# Altium PCB Rev 1.0.PcbDoc
Units mil, origin at the board's own origin, x right, y up, seen from the top; angles counter-clockwise.
Board outline 7480.31 x 3750 mil, 2 copper layers (Top Layer, Bottom Layer); 52 components, 22 nets, 145 pads, 0 vias.
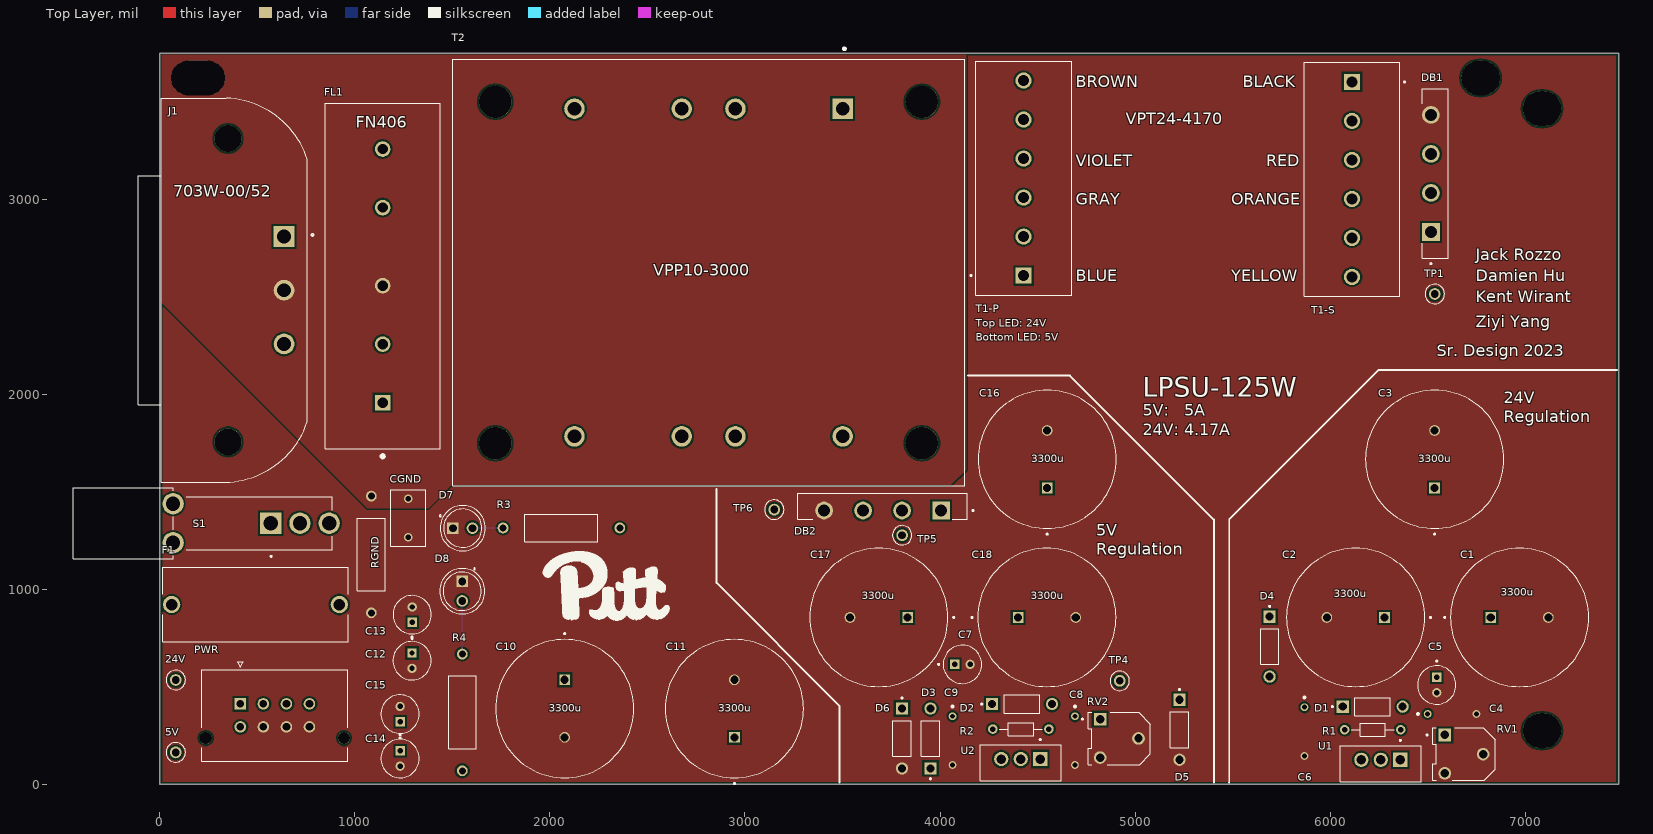
[diagram p0: Top Layer view]
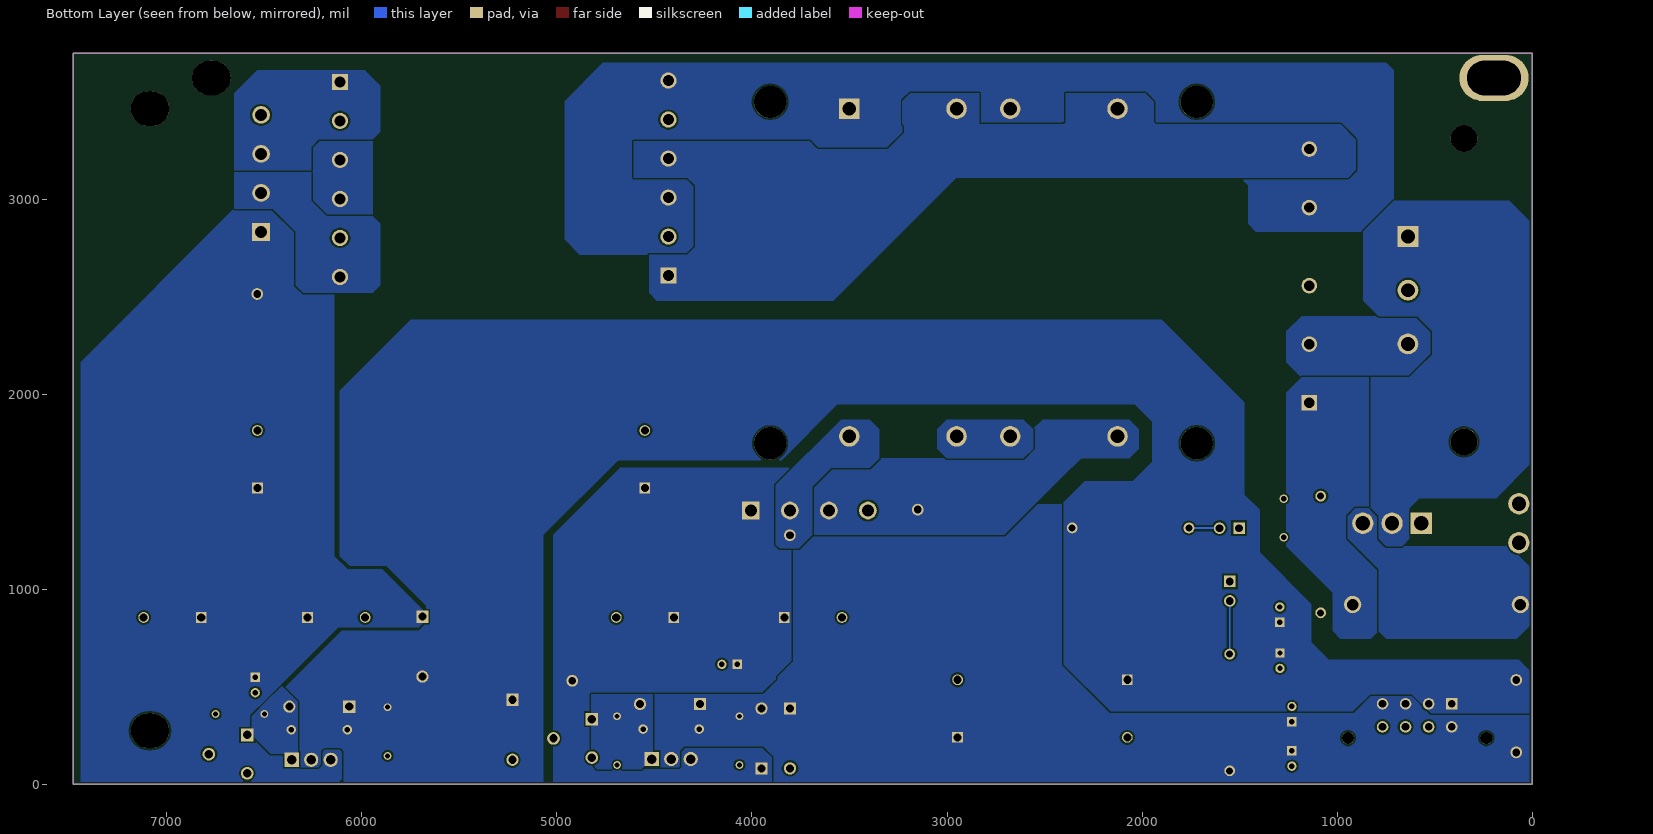
[diagram p1: Bottom Layer view, seen from below]
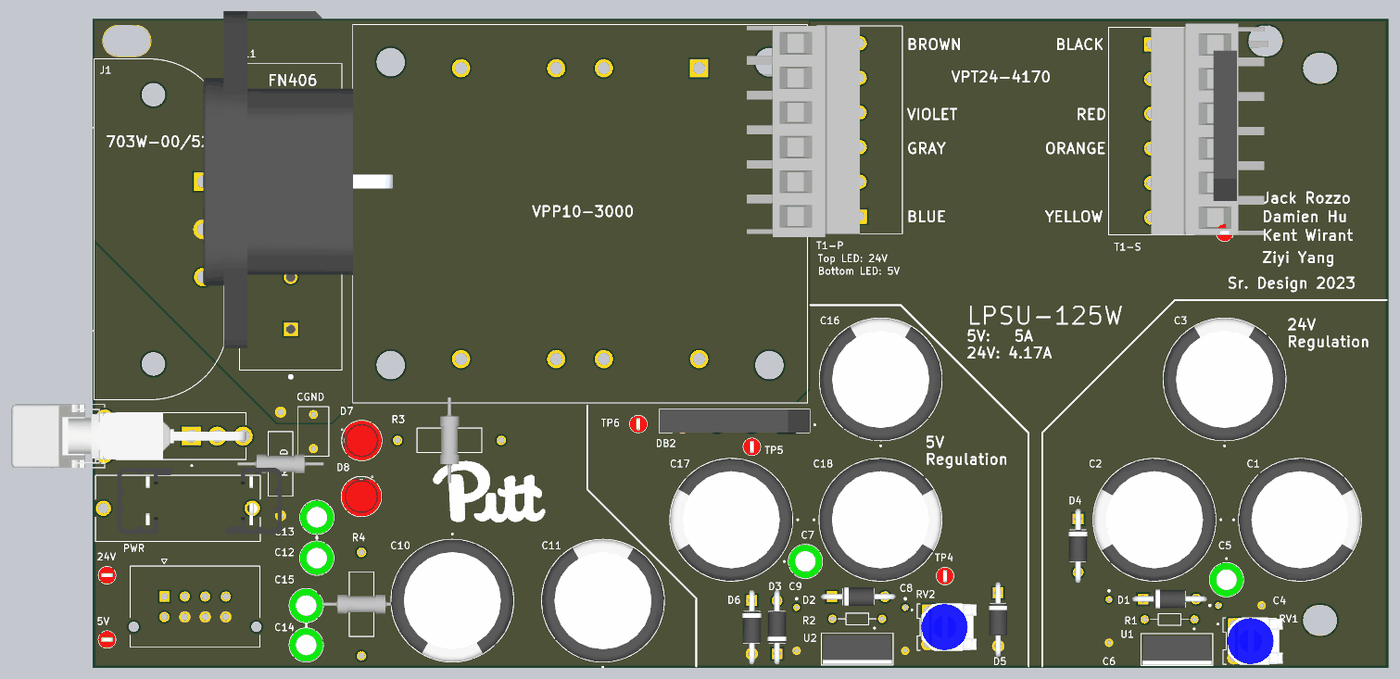
[diagram p2: 3D render of the assembled board from above, using the file's embedded part models]

## Layer stack, top to bottom
Top Solder: solder mask 0.4, Solder Resist, Dk 3.5
Top Layer: signal copper 1.4
Dielectric 1: dielectric 12.6, FR-4, Dk 4.8
Bottom Layer: signal copper 1.4
Bottom Solder: solder mask 0.4, Solder Resist, Dk 3.5

## Board outline
0,0 7480.32,0 7480.32,3750 0,3750

## Design rules (kind name [scope] priority, off if disabled: settings)
Clearance [All] p1: gap=10 ignorepadtopadclearanceinfootprint=FALSE except(0: Arc-Hole Track-Hole SMDPad-Hole THPad-Hole Via-Hole Fill-Hole Poly-Hole Region-Hole Text-Hole)
PolygonConnect [All] p1: connectstyle=Direct reliefconductorwidth=10 reliefentries=4 polygonreliefangle="90 Angle" airgapwidth=10
RoutingVias [All] p1: holewidth=28 width=50 viastyle="Through Hole" minholewidth=28 minwidth=50 maxholewidth=28 maxwidth=50
SolderMaskExpansion [All] p1: expansion=4 istentingtop=FALSE
Width [All] p1: maxlimit=10 minlimit=10 preferedwidth=10
30 further rules are at their usual default settings.

## Components (designator, comment, footprint, x,y, rotation, side; value= is the part's Value field where it differs from the comment)
5V "5000" KEYSTONE_5000 81.92,164.62 r0 top (schematic designator TP3)
24V "5000" KEYSTONE_5000 81.92,535.98 r0 top (schematic designator TP2)
C1 "UVZ1H332MHD" CAPPRD750W80D1800H3550 6971.05,856.41 r0 top
C2 "UVZ1H332MHD" CAPPRD750W80D1800H3550 6130.42,856.41 r180 top
C3 "UVZ1H332MHD" CAPPRD750W80D1800H3550 6535.43,1667.33 r90 top
C4 "10u" "6.35mm Tantalum Radial" 6499.72,361.7 r0 top
C5 "0.1u" CAPPRD200W50D550H1250 6546.51,510.06 r270 top
C6 "1u" "6.35mm Tantalum Radial" 5867.97,396.33 r270 top
C7 "0.1u" CAPPRD200W50D550H1250 4114.87,615.96 r0 top
C8 "10u" "6.35mm Tantalum Radial" 4691.64,350.02 r270 top
C9 "1u" "6.35mm Tantalum Radial" 4064.21,350.02 r270 top
C10 "4700u" CAPPRD750W80D1800H3550 2075.92,389.24 r270 top
C11 "4700u" CAPPRD750W80D1800H3550 2945.91,389.24 r90 top
C12 "0.1u" CAPPRD200W50D550H1250 1293.27,634.74 r270 top
C13 "0.1u" CAPPRD200W50D550H1250 1294.06,870.68 r90 top
C14 "0.1u" CAPPRD200W50D550H1250 1232.16,133.33 r270 top
C15 "0.1u" CAPPRD200W50D550H1250 1232.16,361.07 r90 top
C16 "UVZ1H332MHD" CAPPRD750W80D1800H3550 4549.49,1667.33 r90 top
C17 "UVZ1H332MHD" CAPPRD750W80D1800H3550 3686.33,856.41 r180 top
C18 "UVZ1H332MHD" CAPPRD750W80D1800H3550 4548.02,856.41 r0 top
CGND "0.1u Film" CAPRR500W50L730T450H950 1273.78,1366.17 r270 top
D1 "1N4007-T" DIOAD780W78L463D236 6218.02,399.05 r0 top
D2 "1N4007-T" DIOAD780W78L463D236 4420.54,412.36 r0 top
D3 "1N4007-T" DIOAD780W78L463D236 3950.94,236.12 r90 top
D4 "1N4007-T" DIOAD780W78L463D236 5689.53,706.75 r270 top
D5 "1N4007-T" DIOAD780W78L463D236 5227.95,280.68 r270 top
D6 "1N4007-T" DIOAD780W78L463D236 3804.97,236.12 r270 top
D7 "WP7113ID" LED_WP7113ID 1552.9,1314.16 r0 top
D8 "WP7113ID" LED_WP7113ID 1550.48,990.94 r270 top
DB1 "GBU801" SIP343W114P508L2205H2134Q4 6538.74,3132.93 r90 top
DB2 "GBU801" SIP343W114P508L2205H2134Q4 3705.61,1426.78 r180 top
F1 "4527" FUSE_4527 490.62,922.63 r0 top
FL1 "FN406-3-02" FIL_FN406-3-02 1142.78,2607.76 r90 top
J1 "703W-00/52" QUALTEK_703W-00/52 637.29,2809.64 r270 top
PWR "452800801" MOLEX_452800801 412.91,413.42 r180 top
R1 "270" RESAD730W45L360D200 6218.02,280.68 r180 top
R2 "270" RESAD730W45L360D200 4414.41,284.1 r180 top
R3 "1.1k" RESAD1520W70L1030D380 2059.17,1315.22 r180 top
R4 "200" RESAD1520W70L1030D380 1551.01,369.25 r90 top
RGND "200" RESAD1520W70L1030D380 1084.47,1179.14 r270 top
RV1 "5k" TRIM_3306F-1-502 6686.01,155.7 r180 top
RV2 "1k" TRIM_3306F-1-502 4919.16,236.34 r180 top
S1 "300SP1J1BLKM7QE" SW_300SP1J1BLKM7QE 718.37,1339.4 r0 top
T1-P "282847-6" TE_282847-6 4428.1,3108.92 r90 top
T1-S "282847-6" TE_282847-6 6111.97,3101.81 r270 top
T2 "VPP10-3000" XFMR_VPP10-3000 2813.48,2624.57 r270 top
TP1 "5000" KEYSTONE_5000 6536.4,2514.67 r0 top
TP4 "5000" KEYSTONE_5000 4921.26,531.5 r90 top
TP5 "5000" KEYSTONE_5000 3805.68,1277.79 r90 top
TP6 "5000" KEYSTONE_5000 3150.13,1409.26 r90 top
U1 "LM338T" TO254P1054X470X1955-3 6259.83,126.38 r180 top
U2 "LM338T" TO254P1054X470X1955-3 4413.83,130.55 r180 top

## Footprints (in the part's own frame and the unit in brackets; to place one, negate y for a bottom-side part, rotate by r counter-clockwise, add the part's x,y. Pads: shape width x height; smd on the part's side, far side on the other; paste and mask are expansions set on the pad)
"6.35mm Tantalum Radial" [mil]
  round 40 hole 25: N(250,0) P(0,0)
  silkscreen extent -55,-5 -45,5
CAPPRD200W50D550H1250 [mm]
  rect 1.208x1.208 hole 0.7: 1(-1,0)
  round 1.208 hole 0.7: 2(1,0)
  silkscreen extent -3.2,-2.5 2.5,2.5, body extent -2.5,-2.49 2.5,2.49, height 12
CAPPRD750W80D1800H3550 [mm]
  round 1.4 hole 1.05: N(3.75,0)
  rect 1.4x1.4 hole 1.05: P(-3.75,0)
  silkscreen extent -9.85,-9 9,9, body extent -8.97,-9 9,9, height 35.5
CAPRR500W50L730T450H950 [mm]
  round 1.1 hole 0.75: 1(-2.5,0) 2(2.5,0)
  silkscreen extent -3.65,-2.25 3.65,2.25
DIOAD780W78L463D236 [mm]
  round 1.59 hole 1.06: A(3.905,0)
  rect 1.59x1.59 hole 1.06: K(-3.905,0)
  silkscreen extent -5.35,-1.18 2.32,1.18, body extent -5.47,-1.35 5.47,1.35, height 2.68
FIL_FN406-3-02 [mm]
  rect 2.03x2.03 hole 1.35: 1(-16.51,0)
  round 2.03 hole 1.35: 2(-8.89,0) 3(-1.27,0) 4(8.89,0) 5(16.51,0)
  silkscreen extent -23.7,-7.5 22.5,7.5
FUSE_4527 [mm]
  round 2.25 hole 1.5: 1(-10.92,0) 2(10.92,0)
  silkscreen extent -12.08,-4.85 12.08,4.85, body extent -8.9,-3.75 15.26,5.95, height 4.55
KEYSTONE_5000 [mm]
  round 1.53 hole 1.02: TP(0,0)
  silkscreen extent -1.27,-1.27 1.27,1.27, body extent -1.26,-1.27 1.26,1.27, height 4.57
LED_WP7113ID [mm]
  round 1.508 hole 1: A(1.27,0)
  rect 1.508x1.508 hole 1: C(-1.27,0)
  silkscreen extent -3.03,-2.95 2.95,2.95, body extent -2.5,-2.95 2.93,2.95, height 9.6
MOLEX_452800801 [mm]
  rect 1.505x1.505 hole 1.005 mask+0.076: 1(0,0)
  round 1.505 hole 1.005 mask+0.076: 2(-3,0) 3(-6,0) 4(-9,0) 5(0,3) 6(-3,3) 7(-6,3) 8(-9,3)
  round 1.57 hole 1.57 unplated mask+0.076: ""(-13.5,4.45) ""(4.5,4.45)
  silkscreen extent -14,-5.49 5,7.45
QUALTEK_703W-00/52 [mm]
  rect 2.7x2.7 hole 1.8: 1(0,0)
  round 2.7 hole 1.8: 2(7,0) 3(14,0)
  round 3.5 hole 3.5 unplated: ""(-12.75,-7.3) ""(26.75,-7.3)
  silkscreen extent -18,-19 32,3.85, body extent -25.05,0 25.05,27.79, height 11.5
RESAD730W45L360D200 [mm]
  round 1.238 hole 0.73: 1(-3.65,0) 2(3.65,0)
  silkscreen extent -2.8,-0.85 2.8,0.85
RESAD1520W70L1030D380 [mm]
  round 1.408 hole 0.9: 1(-7.6,0) 2(7.6,0)
  silkscreen extent -4.75,-1.8 4.75,1.8, body extent -1.39,-6.3 1.39,6.3, height 1.4
SIP343W114P508L2205H2134Q4 [mm]
  round 2.31 hole 1.54: AC1(-2.54,0.56) AC2(2.54,0.56) NEG(7.62,0.56)
  rect 2.31x2.31 hole 1.54: POS(-7.62,0.56)
  silkscreen extent -11.86,-1.72 11.02,1.72, body extent -11.02,-1.72 11.02,1.72, height 21.55
SW_300SP1J1BLKM7QE [mm]
  rect 2.775x2.775 hole 1.85: 1(-3.81,0)
  round 2.775 hole 1.85: 2(0,0) 3(3.81,0) S1(-16.51,-2.54) S2(-16.51,2.54)
  silkscreen extent -29.54,-4.63 4.19,4.63, body extent -30.14,-4.72 4.19,4.72, height 17.1
TE_282847-6 [mm]
  rect 2.1x2.1 hole 1.4: 1(-12.7,0)
  round 2.1 hole 1.4: 2(-7.62,0) 3(-2.54,0) 4(2.54,0) 5(7.62,0) 6(12.7,0)
  silkscreen extent -15.24,-6.25 15.24,6.95, body extent -15.74,0 15.24,17.14, height 4.18
TO254P1054X470X1955-3 [mm]
  rect 1.86x1.86 hole 1.24: 1(-2.54,0)
  round 1.86 hole 1.24: 2(0,0) 3(2.54,0)
  silkscreen extent -5.27,-2.64 5.27,2.86, body extent -5.08,-1.49 5.08,2.71, height 22.86
TRIM_3306F-1-502 [mm]
  rect 1.65x1.65 hole 1.1: 1(2.5,-2.5)
  round 1.65 hole 1.1: 2(-2.5,0) 3(2.5,2.5)
  silkscreen extent -4.05,-3.4 4.9,3.4, body extent -4.7,-3.4 3.4,3.4, height 8.38
XFMR_VPP10-3000 [mil]
  rect 105x105 hole 70: 1(-840,687.5)
  round 105 hole 70: 3(-840,137.5) 4(-840,-137.5) 6(-840,-687.5) 7(840,687.5) 9(840,137.5) 10(840,-137.5) 12(840,-687.5)
  round 166 hole 166 unplated: ""(-875,1093.5) ""(-875,-1093.5) ""(875,1093.5) ""(875,-1093.5)
  silkscreen extent -1153,-1313 1094,1312

## Part data
5V 24V D1 D2 D3 D4 D5 D6 DB1 DB2 F1 PWR S1 T1-P T1-S TP1 TP4 TP5 TP6: Package=None, Availability=Unavailable, Price=None
  5V 24V TP1 TP4 TP5 TP6: MF="{'manufacturer': u'Keystone Electronics'}", MP=5000
  D1 D2 D3 D4 D5 D6: MF="{'manufacturer': u'Diodes Incorporated'}", MP=1N4007-T
  DB1 DB2: MF="{'manufacturer': u'Diodes Inc.'}", MP=GBU801
  F1: MF="{'manufacturer': u'Keystone'}", MP=4527
  PWR: MF="{'manufacturer': u'Molex'}", MP=452800801
  S1: MF="{'manufacturer': u'E-Switch'}", MP=300SP1J1BLKM7QE
  T1-P T1-S: MF="{'manufacturer': u'TE Connectivity'}", MP=282847-6
C1 C2 C3 C4 C6 C8 C9 C10 C11 C16 C17 C18: library part ECA1VHG472, "NHG-A", Package=None, Availability=Unavailable, MF="{'manufacturer': u'Panasonic'}", MP=ECA1VHG472, Price=None
C5 C7 C12 C13 C14 C15: library part UVR1H0R1MDD, "0.47ÂµF 100V Aluminum Electrolytic Capacitors Radial, Can 2000 Hrs @ 85Â°C", Package=None, Availability=Unavailable, MF="{'manufacturer': u'Nichicon'}", MP=UVR1H0R1MDD, Price=None
CGND: library part B32529C3104K289, Package=None, Availability=Unavailable, MF="{'manufacturer': u'EPCOS'}", MP=B32529C3104K289, Price=None
D7 D8: "LED; Thru-Hole; Green; T1-3/4; 5mm; Clear Lens; 25ma; 565nm; 200mcd; Round", Package=None, Availability=Unavailable, MF="{'manufacturer': u'Kingbright'}", MP=WP7113ID, Price=None
FL1: "Single Phase EMC/EMI Line Filter 3A 250VAC DC ~ 400Hz Single Stage PC Pins", Package=None, Availability=Unavailable, MF="{'manufacturer': u'Schaffner EMC'}", MP=FN406-3-02, Price=None
J1: "3 Position 250 V 10 A Male Pins AC Receptacle Right Angle Connector", Package=None, Availability=Unavailable, MF="{'manufacturer': u'Qualtek'}", MP=703W-00/52, Price=None
R1 R2: library part CF18JT680R, "Res Carbon Film 680 Ohm 5% 0.125W(1/8W) -400ppm/C to 0ppm/C Conformal Coated AXL T/R", Package=None, Availability=Unavailable, MF="{'manufacturer': u'Stackpole Electronics'}", MP=CF18JT680R, Price=None
R3 R4 RGND: library part CBT50J5R1, "5.1 Ohms +/-5% 0.5W, 1/2W Through Hole Resistor Axial Pulse Withstanding Carbon Composition", Package=None, Availability=Unavailable, MF="{'manufacturer': u'TE Connectivity / AMP'}", MP=CBT50J5R1, Price=None
RV1 RV2: library part 3306F-1-502, "2 kOhms 0.2W, 1/5W PC Pins Through Hole Trimmer Potentiometer Cermet 1 Turn Top Adjustment", Package=None, Availability=Unavailable, MF="{'manufacturer': u'Bourns'}", MP=3306F-1-502, Price=None
T2: "Power Transformer 4000Vrms Dual Prim. Dual Sec. 230V/115V Prim. 10V/5V Sec. Through Hole", Package=None, Availability=Unavailable, MF="{'manufacturer': u'Triad Magnetics'}", MP=VPP10-3000, Price=None
U1 U2: library part LM338T/NOPB-ND

## Free pads (board coordinates)
  oval 275.59x177.17 / inner round 60 / far side oval 354.33x236.22 hole 177.17 slot 275.59 at 0 deg: 6(196.05,3622.05)
  oval 196.85x177.17 hole 177.17 slot 196.85 at 0 deg: CASE(7086.61,275.59) CASE(7086.61,3464.57) ENC(6771.65,3622.05)

## Nets (pads, with @x,y where several pads share a name; then routed paths per layer and width w, separated by ;. In a path a pad name is that pad's centre, name@x,y a point inside that pad or via, vN(x,y) a via of type N, cw(c..) or ccw(c..) an arc to the next point about the centre after c; other vN are vias at no path point)
+5: 5V.TP C9.P C11.P C14.1 C15.1 D2.K D3.A D6.K PWR.3 PWR.4 PWR.5 R2.2 R4.1 U2.2
+12: C7.1 C16.P C17.P C18.P D3.K DB2.POS TP4.TP U2.3
+24: 24V.TP C6.P C10.P C12.1 C13.1 D1.K D4.A D5.K PWR.1 PWR.2 R1.2 R3.1 U1.2
+32: C1.P C2.P C3.P C5.1 D4.K DB1.POS TP1.TP U1.3
_N: FL1.4 T1-P.3 T1-P.6 T2.1 T2.4
_P: FL1.5 T1-P.1 T1-P.4 T2.3 T2.6
EARTH: CGND.1 FL1.3 J1.2 pad.6 RGND.1
GND: C1.N C2.N C3.N C4.N C5.2 C6.N C7.2 C8.N C9.N C10.N C11.N C12.2 C13.2 C14.2 C15.2 C16.N C17.N C18.N CGND.2 D5.A D6.A D7.C D8.C DB1.NEG DB2.NEG PWR.6 PWR.7 PWR.8 RGND.2 RV1.2 RV1.3 RV2.2 RV2.3
NetC4_P: C4.P D1.A R1.1 RV1.1 U1.1
NetC8_P: C8.P D2.A R2.1 RV2.1 U2.1
NetD7_A: D7.A R3.2 | length 157.5
  Bottom Layer w10: D7.A 1603.44,1314.69 1759.42,1314.69 R3.2
NetD8_A: D8.A R4.2 | length 272.7
  Bottom Layer w10: D8.A 1550.75,940.68 1550.75,668.73 R4.2
NetF1_1: F1.1 S1.3
NetF1_2: F1.2 FL1.1
NetFL1_2: FL1.2 J1.3
NetJ1_1: J1.1 S1.2
NetT1-S_3: T1-S.3 T1-S.4
NetT2_9: T2.9 T2.10
T1_O1: DB1.AC2 T1-S.1
T1_O2: DB1.AC1 T1-S.6
T2_O1: DB2.AC2 T2.12 TP6.TP
T2_O2: DB2.AC1 T2.7 TP5.TP
pads on no net: J1. PWR. S1.1 S1.S1 S1.S2 T1-P.2 T1-P.5 T1-S.2 T1-S.5 T2.

## Polygon pours and split planes (outlines as drawn)
GND on Top Layer "GND_L01_P028" (solid, pour order 28): 0,0 7480.32,0 7480.32,3750 0,3750
EARTH on Top Layer "NONET_L-01_P-001" (solid, pour order 2): 9.84,2470.47 1062.99,1417.32 1377.95,1417.32 1496.06,1535.43 4055.12,1535.43 4133.86,1614.17 4133.86,3740.16 9.84,3740.16
NetC4_P on Bottom Layer "NONET_L-01_P-001" (solid, pour order 24): 6417.32,511.81 6328.74,423.23 6328.74,157.48 6466.54,157.48 6564.96,255.91 6564.96,364.17
+24 on Bottom Layer "NONET_L-01_P-001" (solid, pour order 27): 4685.04,1663.39 3848.42,1663.39 3562.99,1948.82 2037.4,1948.82 1948.82,1860.24 1948.82,1653.54 2047.24,1555.12 2293.31,1555.12 2411.42,1437.01 2411.42,610.24 2165.35,364.17 915.35,364.17 826.77,452.76 620.08,452.76 521.65,354.33 9.84,354.33 9.84,580.71 68.9,639.76 1043.31,639.76 1131.89,728.35 1131.89,925.2 1397.64,1190.94 1397.64,1407.48 1476.38,1486.22 1476.38,1958.66 1899.61,2381.89 5748.03,2381.89 6112.2,2017.72 6112.2,1171.26 6062.99,1122.05 5875.98,1122.05 5669.29,915.35 5669.29,826.77 5708.66,787.4 6102.36,787.4 6397.64,492.13 6328.74,423.23 6328.74,78.74 6220.47,78.74 6200.79,98.43 6200.79,167.32 6190.94,177.17 6112.2,177.17 6102.36,167.32 6102.36,29.53 6082.68,9.84 5068.9,9.84 5068.9,1279.53
+5 on Bottom Layer "NONET_L-01_P-001" (solid, pour order 26): 2549.21,1437.01 2411.42,1437.01 2411.42,1279.53 2411.42,610.24 2165.35,364.17 915.35,364.17 826.77,452.76 620.08,452.76 521.65,354.33 9.84,354.33 9.84,9.84 3897.64,9.84 3897.64,137.8 3946.85,187.01 4340.55,187.01 4360.24,167.32 4360.24,88.58 4370.08,78.74 4552.51,78.74 4552.51,93.16 4507.87,137.8 4507.87,472.44 3946.85,472.44 3789.37,629.92 3789.37,1210.63 3759.84,1210.63 3690.94,1279.53 2706.69,1279.53
NetC8_P on Bottom Layer "NONET_L-01_P-001" (solid, pour order 25): 4507.87,472.44 4507.87,137.8 4566.93,78.74 4793.31,78.74 4822.83,108.27 4822.83,472.44
+12 on Bottom Layer "NONET_L-01_P-001" (solid, pour order 23): 4822.83,472.44 4822.83,108.27 4793.31,78.74 4370.08,78.74 4360.24,88.58 4360.24,167.32 4340.55,187.01 3946.85,187.01 3897.64,137.8 3897.64,9.84 5019.69,9.84 5019.69,1279.53 4675.2,1624.02 3789.37,1624.02 3789.37,629.92 3937.01,482.28 3946.85,472.44
T2_O1 on Bottom Layer "NONET_L-01_P-001" (solid, pour order 22): 2066.93,1870.08 2017.72,1820.87 2017.72,1722.44 2066.93,1673.23 2312.99,1673.23 2411.42,1574.8 2706.69,1279.53 3690.94,1279.53 3690.94,1525.59 3592.52,1624.02 3395.67,1624.02 3346.46,1673.23 2608.27,1673.23 2559.06,1722.44 2559.06,1820.87 2509.84,1870.08
T2_O2 on Bottom Layer "NONET_L-01_P-001" (solid, pour order 21): 3395.67,1870.08 3346.46,1820.87 3346.46,1673.23 3395.67,1624.02 3592.52,1624.02 3690.94,1525.59 3690.94,1279.53 3759.84,1210.63 3858.27,1210.63 3877.95,1230.32 3877.95,1535.43 3543.31,1870.08 3533.46,1870.08
NetT2_9 on Bottom Layer "NONET_L-01_P-001" (solid, pour order 20): 2608.27,1870.08 2559.06,1820.87 2559.06,1722.44 2608.27,1673.23 3001.97,1673.23 3051.18,1722.44 3051.18,1820.87 3001.97,1870.08
+32 on Bottom Layer "NONET_L-01_P-001" (solid, pour order 16): 6318.9,78.74 6313.22,84.42 6313.22,141.96 6328.74,157.48 6466.54,157.48 6564.96,255.91 6564.96,364.17 6496.06,433.07 6122.05,807.09 5708.66,807.09 5688.98,826.77 5688.98,895.67 5895.67,1102.36 6072.83,1102.36 6141.73,1171.26 6141.73,2519.69 6299.21,2519.69 6338.58,2559.06 6338.58,2834.65 6456.69,2952.76 6653.54,2952.76 7440.94,2165.35 7440.94,9.84 6122.05,9.84 6102.36,29.53 6102.36,167.32 6112.2,177.17 6190.94,177.17 6200.79,167.32 6200.79,98.43 6220.47,78.74
NetT1-S_3 on Bottom Layer "NONET_L-01_P-001" (solid, pour order 14): 5944.88,3307.09 5944.88,2913.39 6181.1,2913.39 6259.84,2992.13 6259.84,3267.72 6220.47,3307.09
T1_O2 on Bottom Layer "NONET_L-01_P-001" (solid, pour order 13): 6653.54,3149.61 6653.54,2952.76 6456.69,2952.76 6338.58,2834.65 6338.58,2559.06 6299.21,2519.69 5944.88,2519.69 5905.51,2559.06 5905.51,2874.02 5944.88,2913.39 6181.1,2913.39 6259.84,2992.13 6259.84,3149.61
T1_O1 on Bottom Layer "NONET_L-01_P-001" (solid, pour order 12): 5984.25,3661.42 5905.51,3582.68 5905.51,3346.46 5944.88,3307.09 6220.47,3307.09 6259.84,3267.72 6259.84,3149.61 6653.54,3149.61 6653.54,3543.31 6535.43,3661.42
_N on Bottom Layer "NONET_L-01_P-001" (solid, pour order 11): 4763.78,3700.79 4960.63,3503.94 4960.63,2795.28 4881.89,2716.54 4291.34,2716.54 4291.34,3070.87 4330.71,3110.24 4606.3,3110.24 4606.3,3307.09 3700.79,3307.09 3661.42,3267.72 3307.09,3267.72 3228.35,3346.46 3228.35,3503.94 3188.98,3543.31 2834.65,3543.31 2834.65,3385.83 2401.57,3385.83 2401.57,3543.31 1968.5,3543.31 1929.13,3503.94 1929.13,3385.83 984.25,3385.83 905.51,3307.09 905.51,3149.61 944.88,3110.24 1496.06,3110.24 1456.69,3070.87 1456.69,2874.02 1417.32,2834.65 866.14,2834.65 708.66,2992.13 708.66,3661.42 748.03,3700.79
_P on Bottom Layer "NONET_L-01_P-001" (solid, pour order 10): 3221.14,3378.62 3221.14,3353.67 3307.09,3267.72 3661.42,3267.72 3700.79,3307.09 4606.3,3307.09 4606.3,3110.24 4330.71,3110.24 4291.34,3070.87 4291.34,2755.91 4330.71,2716.54 4527.56,2716.54 4527.56,2519.69 4488.19,2480.32 3582.68,2480.32 2952.76,3110.24 944.88,3110.24 905.51,3149.61 905.51,3307.09 984.25,3385.83 1929.13,3385.83 1929.13,3503.94 1968.5,3543.31 2401.57,3543.31 2401.57,3385.83 2834.65,3385.83 2834.65,3543.31 3188.98,3543.31 3228.35,3503.94 3228.35,3385.83
NetF1_2 on Bottom Layer "NONET_L-01_P-001" (solid, pour order 9): 826.77,2086.61 1181.1,2086.61 1259.84,2007.87 1259.84,1220.47 1023.62,984.25 1023.62,787.4 984.25,748.03 826.77,748.03 787.4,787.4 787.4,1102.36 944.88,1259.84 944.88,1377.95 905.51,1417.32 826.77,1417.32
NetF1_1 on Bottom Layer "NONET_L-01_P-001" (solid, pour order 8): 826.77,1417.32 787.4,1377.95 787.4,1259.84 748.03,1220.47 118.11,1220.47 9.59,1111.95 9.59,817.19 78.74,748.03 748.03,748.03 787.4,787.4 787.4,1102.36 944.88,1259.84 944.88,1377.95 905.51,1417.32
NetJ1_1 on Bottom Layer "NONET_L-01_P-001" (solid, pour order 7): 708.66,2992.13 866.14,2834.65 866.14,2480.31 787.4,2401.57 590.55,2401.57 511.81,2322.83 511.81,2204.72 629.92,2086.61 826.77,2086.61 826.77,1417.32 787.4,1377.95 787.4,1259.84 748.03,1220.47 669.29,1220.47 629.92,1259.84 629.92,1417.32 579.19,1468.05 185.49,1468.05 9.84,1643.7 9.84,2883.86 118.11,2992.13
NetFL1_2 on Bottom Layer "NONET_L-01_P-001" (solid, pour order 5): 590.55,2401.57 1181.1,2401.57 1259.84,2322.83 1259.84,2165.35 1181.1,2086.61 629.92,2086.61 511.81,2204.72 511.81,2322.83

## Keep-outs
Keep-Out Layer:
  lines w5: 0,0 7478.37,0 7480.32,1.95 7480.32,3750 0,3750 0,0

## Silkscreen, mask and mechanical layers (free items; w line width, h text height)
Top Overlay:
  drawing of 12 lines, arcs and shapes, not listed
  text "BROWN" at 4695.04,3573.3 h60
  text "BLACK" at 5552.26,3573.3 h60
  text "VPT24-4170" at 4950.94,3385.98 h60
  text "FN406" at 1004.09,3366.3 h60
  text "VIOLET" at 4695.04,3169.76 h60
  text "RED" at 5672.23,3169.76 h60
  text "703W-00/52" at 69.06,3011.97 h60
  text "GRAY" at 4695.04,2972.91 h60
  text "ORANGE" at 5492.28,2972.91 h60
  text "Jack Rozzo" at 6746.29,2687.17 h60
  text "VPP10-3000" at 2529.68,2608.43 h60
  text "BLUE" at 4695.04,2578.9 h60
  text "YELLOW" at 5492.28,2578.9 h60
  text "Damien Hu" at 6746.29,2579.13 h60
  text "Kent Wirant" at 6746.29,2471.09 h60
  text "Top LED: 24V" at 4182.67,2347.21 h40
  text "Ziyi Yang" at 6746.29,2343.06 h60
  text "Bottom LED: 5V" at 4182.67,2274.83 h40
  text "Sr. Design 2023" at 6545.43,2195.35 h60
  text "LPSU-125W" at 5039.53,1988.35 h100
  text "24V" at 6889.92,1955.35 h60
  text "5V:   5A" at 5039.53,1889.92 h60
  text "Regulation" at 6889.92,1857.23 h60
  text "24V: 4.17A" at 5039.53,1791.5 h60
  text "3300u" at 4466.66,1651.7 h40
  text "3300u" at 6452.61,1651.7 h40
  text "5V" at 4800.88,1276.21 h60
  text "Regulation" at 4800.88,1178.1 h60
  text "3300u" at 6875.83,968.62 h40
  text "3300u" at 6019.54,958.78 h40
  text "3300u" at 3598.28,948.94 h40
  text "3300u" at 4464.42,948.94 h40
  text "3300u" at 1993.1,373.61 h40
  text "3300u" at 2863.08,373.61 h40

## Text inside footprints (layer, text, board x,y; h text height)
PWR: Mechanical 13 "PTH D1.005 +/- 0.065" at 969.21,752.01 h19.68 r180; Mechanical 13 "NPTH D1.57 +/- 0.10" at 969.21,712.63 h19.68 r180